# Altium PCB Node.PcbDoc
Units mil, origin at the board's own origin, x right, y up, seen from the top; angles counter-clockwise.
Board outline 1500 x 2000 mil, 4 copper layers (Top Layer, Ground, Power, Bottom Layer); 45 components, 41 nets, 164 pads, 55 vias.
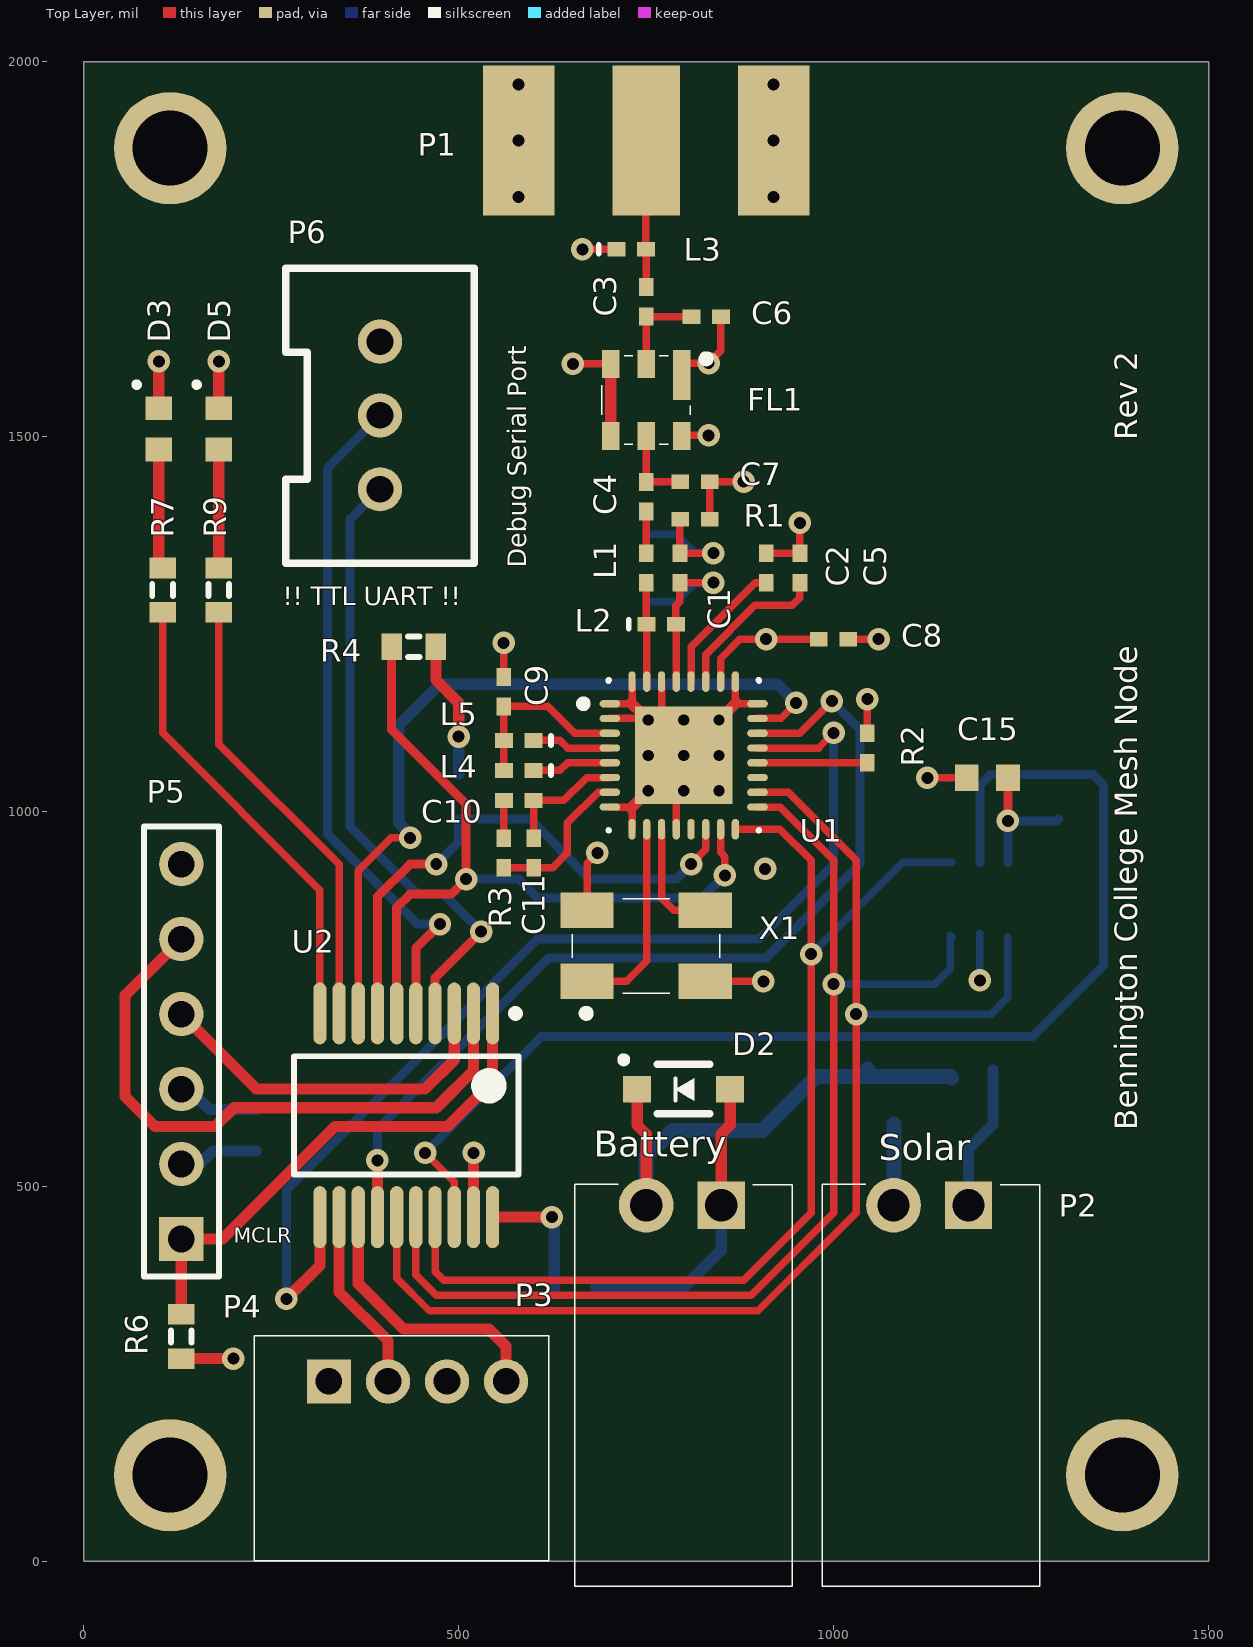
[diagram p0: Top Layer view]
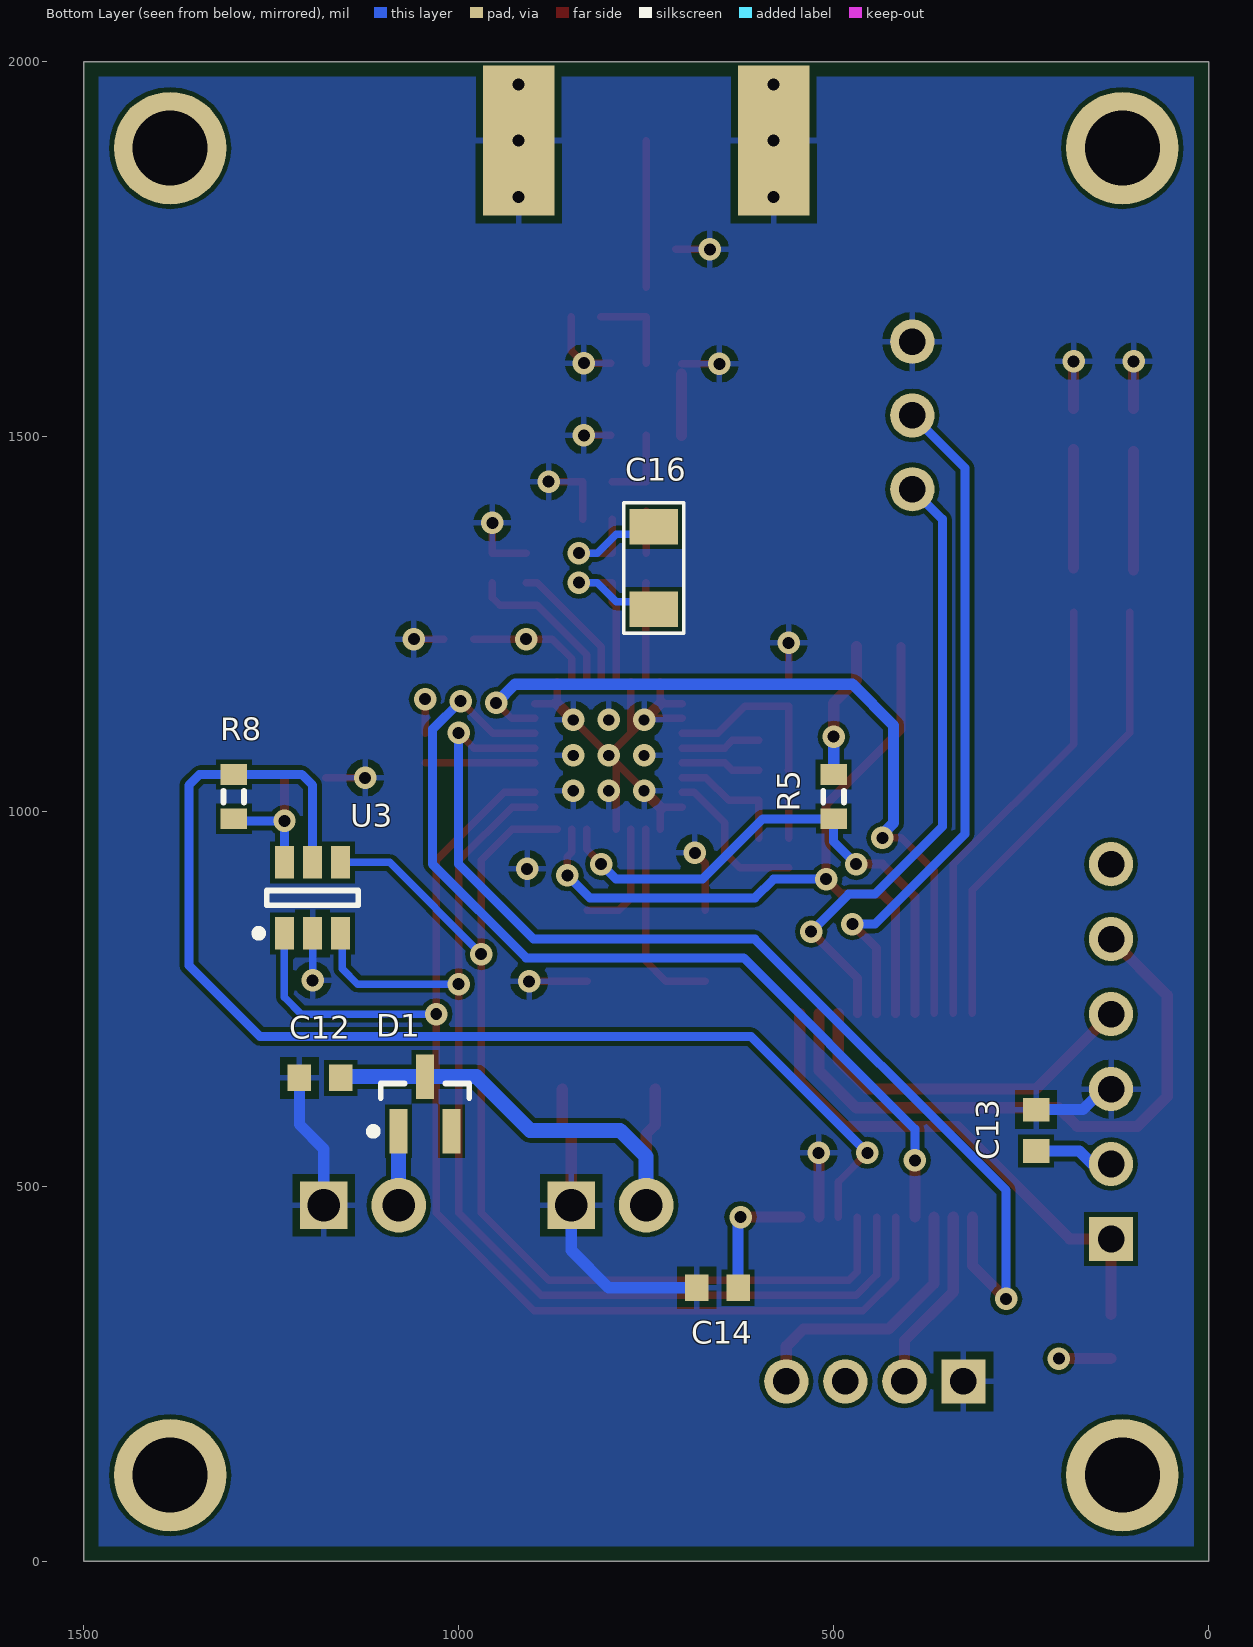
[diagram p1: Bottom Layer view, seen from below]
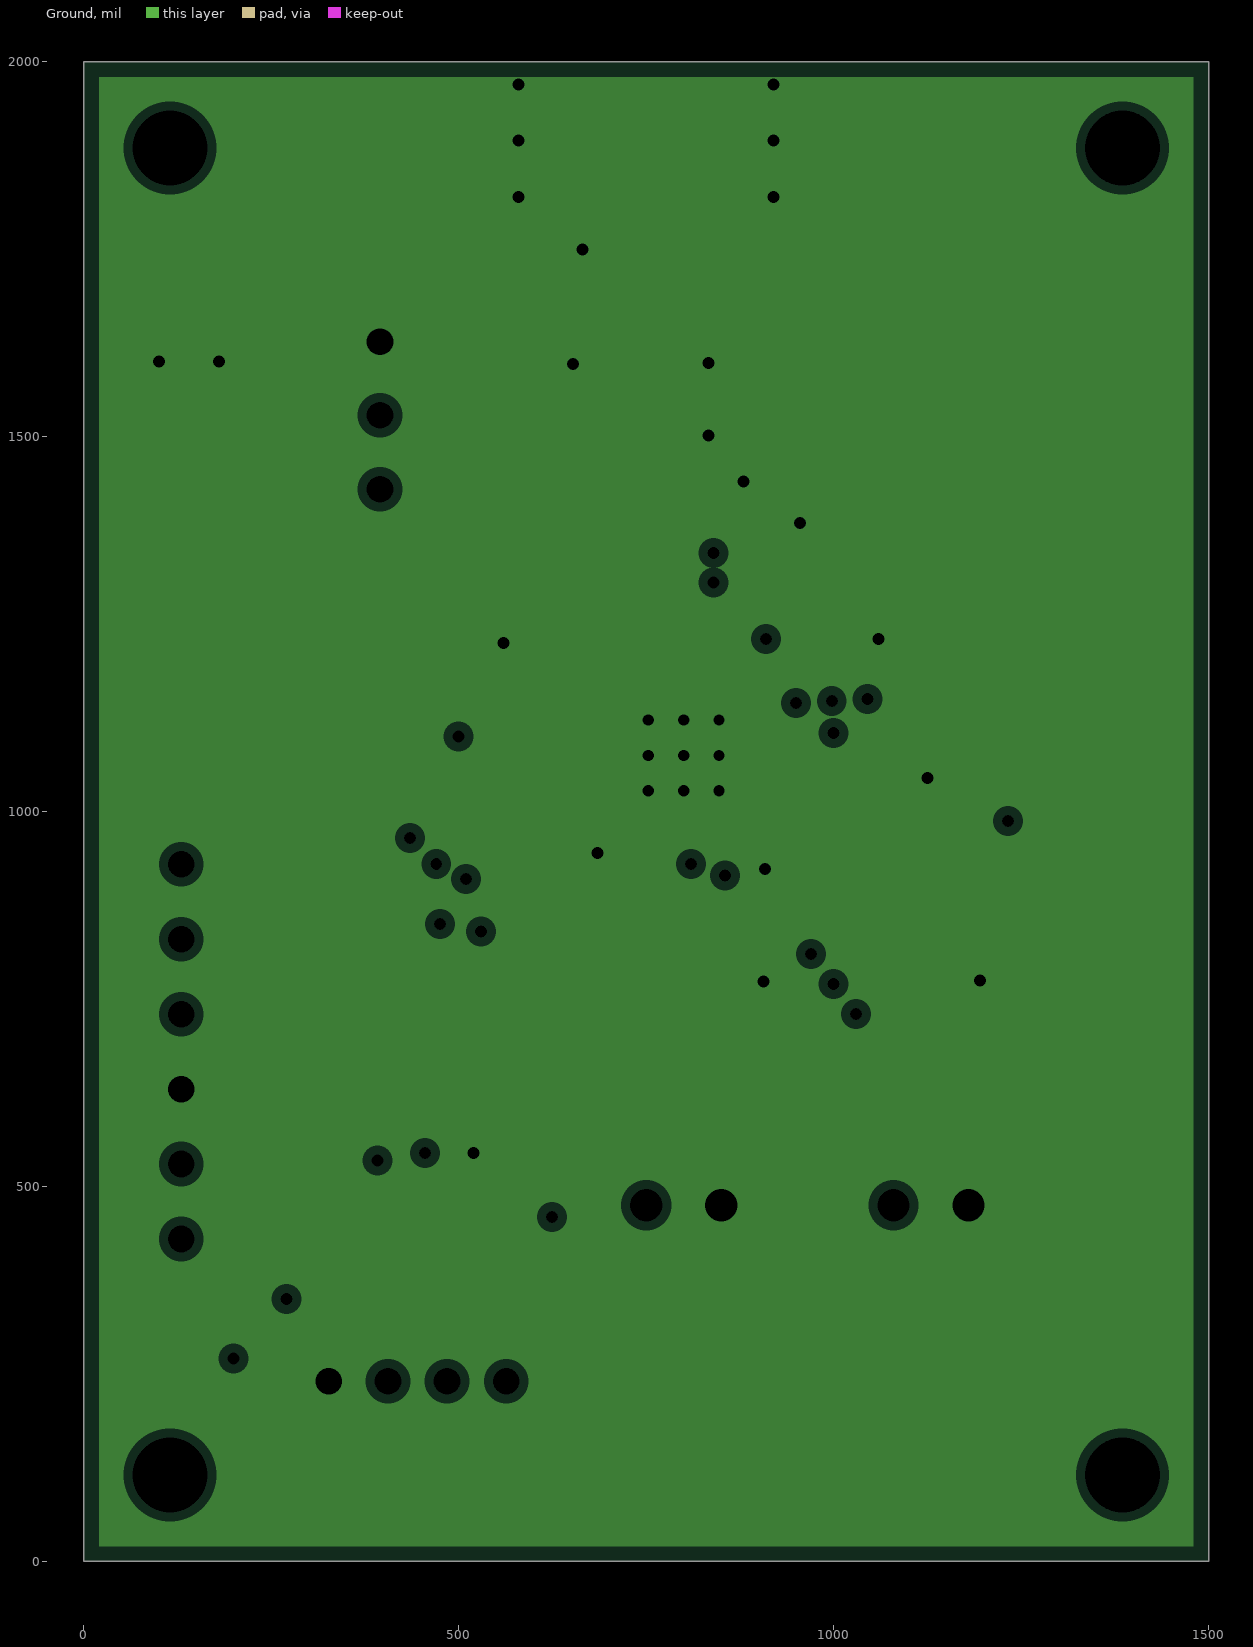
[diagram p2: Ground, clearances drawn from the general rule]
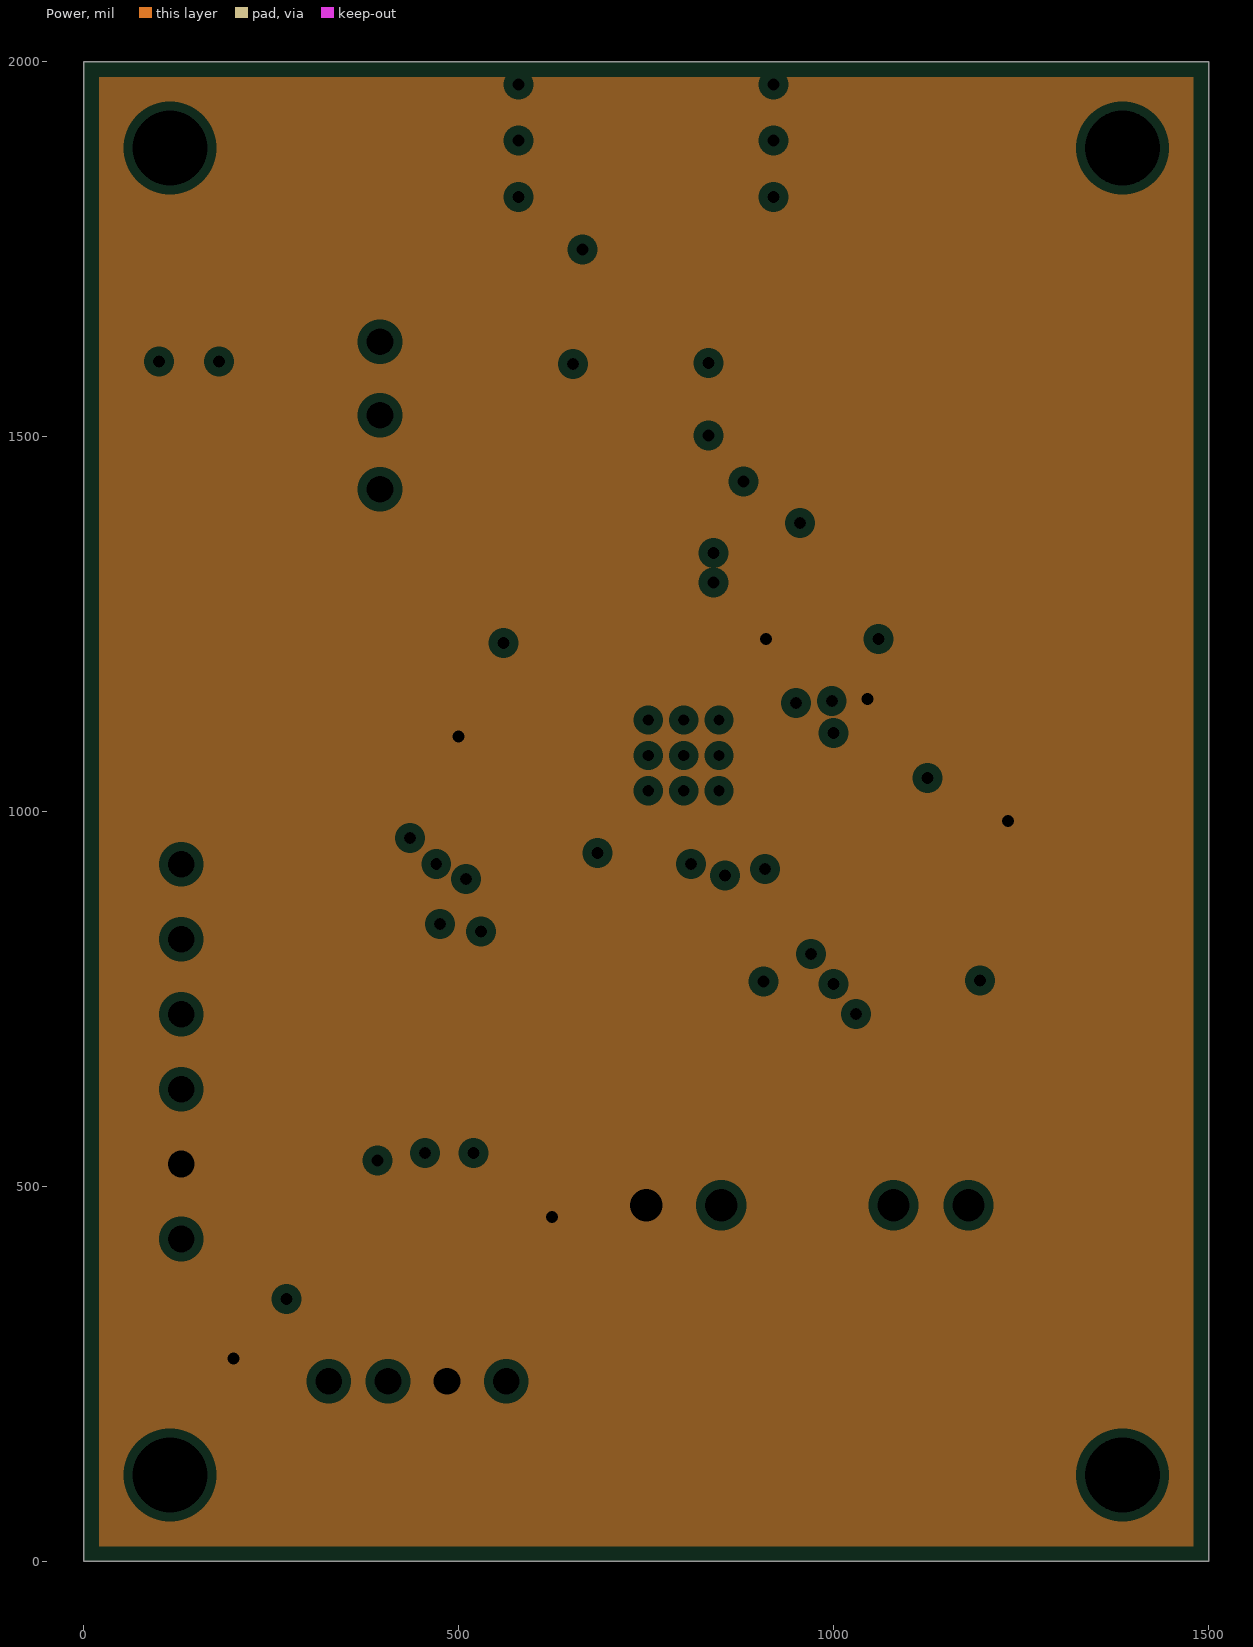
[diagram p3: Power, clearances drawn from the general rule]

## Layer stack, top to bottom
Top Solder: solder mask 0.4, Solder Resist, Dk 3.5
Top Layer: signal copper 1.4
Dielectric1: core 12.6, FR-4, Dk 4.8
Ground: plane copper 1.4, net GND
Dielectric2: prepreg 12.6, FR-4, Dk 4.8
Power: plane copper 1.4, net VIN
Dielectric3: core 12.6, FR-4, Dk 4.8
Bottom Layer: signal copper 1.4
Bottom Solder: solder mask 0.4, Solder Resist, Dk 3.5

## Board outline
0,0 1500,0 1500,2000 0,2000

## Design rules (kind name [scope] priority, off if disabled: settings)
Clearance "Clearance~Sunstone Circuits" [All] p1: gap=6 // Sunstone Circuits Minimum Clearance Rule (MLB~4&6 Layer Designs)
HoleSize "HoleSize~Sunstone Circuits" [All] p1: absolutevalues=TRUE maxlimit=251 minlimit=8 maxpercent=80.000 minpercent=20.000 // Sunstone Circuits Hole Size Rule (MLB~4&6 Layer Designs)
HoleSize Testpoint [All] p2: absolutevalues=TRUE maxlimit=100 minlimit=1 maxpercent=80.000 minpercent=20.000
HoleSize TestPointUsage [All] p3: absolutevalues=TRUE maxlimit=100 minlimit=1 maxpercent=80.000 minpercent=20.000
MinimumAnnularRing "MinimumAnnularRing~Sunstone Circuits" [All] p1: minimumring=7 // Sunstone Circuits Minimum Annular Ring (MLB~4&6 Layer Designs)
MinimumSolderMaskSliver [All] p1: minsoldermaskwidth=1
PlaneClearance "PlaneClearance~Sunstone Circuits" [All] p1: clearance=12 // Sunstone Circuits Power Plane Clearance Rule (MLB~4&6 Layer Designs)
PlaneConnect "PlaneConnect~Sunstone Circuits" [All] p1: planeconnectstyle=Relief reliefexpansion=10 reliefentries=4 reliefconductorwidth=8 reliefairgap=10 // Sunstone Circuits Power Plane Connect Rule (MLB~4&6 Layer Designs)
PolygonConnect "PolygonConnect~Sunstone Circuits" [All] p1: connectstyle=Relief reliefconductorwidth=8 reliefentries=4 polygonreliefangle="90 Angle" airgapwidth=10 // Sunstone Circuits Polygon Connect Style (MLB~4&6 Layer Designs)
RoutingVias "RoutingVias~Sunstone Circuits" [All] p1: holewidth=16 width=30 viastyle="Through Hole" minholewidth=8 minwidth=24 maxholewidth=20 maxwidth=40 // Sunstone Circuits Routing Vias Rule (MLB~4&6 Layer Designs)
ShortCircuit "ShortCircuit~Sunstone Circuits" [All] p1: allowed=FALSE // Sunstone Circuits Short Circuit Rule~Do Not Allow (MLB~4&6 Layer Designs)
SilkToSilkClearance [All] p1: silktosilkclearance=5
SilkToSolderMaskClearance [IsPad] p1: minsilkscreentomaskgap=3.5 clearancetoexposedcopper=TRUE
SolderMaskExpansion "SolderMaskExpansion~Sunstone Circuits" [All] p1: expansion=3 // Sunstone Circuits Solder Mask Expansion Rule (MLB~4&6 Layer Designs)
ViasUnderSMD "ViasUnderSMD~Sunstone Circuits" [All] p1: allowed=FALSE // Sunstone Circuits Vias Under SMD~Do Not Allow (MLB~4&6 Layer Designs)
Width "Width~Sunstone Circuits" [All] p1: maxlimit=100 minlimit=6 preferedwidth=10 // Sunstone Circuits Minimum Width Rule (MLB~4&6 Layer Designs)
22 further rules are at their usual default settings.

## Components (designator, comment, footprint, x,y, rotation, side; value= is the part's Value field where it differs from the comment)
C1 "0402" 0402 795,1325 r270 top
C2 "0402" 0402 910,1325 r90 top
C3 "0402" 0402 750,1680 r270 top
C4 "0402" 0402 750,1420 r270 top
C5 "0603" 0402 955,1325 r270 top
C6 "DNP" 0402 830,1660 r180 top
C7 "0402" 0402 815,1440 r180 top
C8 "0402" 0402 1000,1230 r0 top
C9 "0402" 0402 560,1160 r270 top
C10 "0402" 0402 580,1015 r180 top
C11 "0402" 0402 600,945 r270 top
C12 "0603" 1608[0603] 1185,645 r180 bottom
C13 "0603" 1608[0603] 230,575 r270 bottom
C14 "0603" 1608[0603] 655,365 r180 bottom
C15 "0603" 1608[0603] 1205,1045 r0 top
C16 "1206" "1206 CAP" 740,1325 r270 bottom
D1 "BAT54-7-F" SOT90P240X110-3N 1045,610 r90 bottom
D2 "BZT52C3V6-7-F" SOD-123 800,630 r0 top
D3 "0603" "0603 LED" 100,1510.47 r270 top
D5 "0603" "0603 LED" 180,1510.47 r270 top
FL1 "B3588" B3717 750,1535 r180 top
L1 "0402" 0402-A 750,1325 r270 top
L2 "0402" 0402-A 770,1250 r0 top
L3 "0402" 0402-A 730,1750 r0 top
L4 "0402" 0402-A 580,1055 r180 top
L5 "0402" 0402-A 580,1095 r180 top
P1 "142-0701-801" 142-0701-801 750,1895 r0 top
P2 "70553-0001" 070553-0001 1130,475 r180 top
P3 "70553-0001" 070553-0001 800,475 r180 top
P4 "53015-0410" 53015-0410 445,240 r0 top
P5 "Header 6" HDR1X6 130,430 r90 top
P6 "213415-3" 2132415-3 395,1430 r270 top
R1 "0402" 0402 815,1390 r180 top
R2 "0402" 0402 1045,1085 r90 top
R3 "0402" 0402 560,945 r90 top
R4 "0603" J1-0603 440,1220 r0 top
R5 "0603" J1-0603 500,1020 r90 bottom
R6 "0603" J1-0603 130,300 r90 top
R7 "Res3" J1-0603 105,1295.47 r270 top
R8 "0603" J1-0603 1300,1020 r270 bottom
R9 "Res3" J1-0603 180,1295.47 r270 top
U1 "MRF89XA" QFN50P500X500X75-32N 800,1075 r0 top
U2 "PIC24F32KA301" SOP127P600-8N 430,595 r270 top
U3 "25AA02E48T-I/OT" SOT-23-OT6_N 1195,885 r90 bottom
X1 "12.8 MHz" ABM3B 750,825 r0 top

## Footprints (in the part's own frame and the unit in brackets; to place one, negate y for a bottom-side part, rotate by r counter-clockwise, add the part's x,y. Pads: shape width x height; smd on the part's side, far side on the other; paste and mask are expansions set on the pad)
142-0701-801 [mil] "SMA Jack, 50 ohm, End Launch"
  rect 90x200 smd paste-200: 1(0,0)
  rect 95x200 smd paste-200: 2(-170,0) 3(170,0)
  rect 95x200 smd far side paste-200: 4(170,0) 5(-170,0)
  body extent -185,-87 191,600, height 202
0402 [mm] "Chip Capacitor, Body 1.0x0.5mm, IPC High Density"
  rect 0.6x0.5 smd: 1(-0.5,0) 2(0.5,0)
  body extent -0.55,-0.3 0.55,0.3, height 1.3
0402-A [mm] "Chip Inductor, Body 1.0x0.5mm, IPC High Density"
  rect 0.6x0.5 smd: 1(-0.5,0) 2(0.5,0)
  body extent -0.55,-0.3 0.55,0.3, height 0.55
"0603 LED" [mm] "LED, Body 1.6x0.8mm, IPC High Density"
  rect 0.8x0.9 smd: 1(-0.7,0) 2(0.7,0)
  silkscreen extent -1.55,-0.8 -1.45,-0.7, body extent -0.87,-0.48 0.87,0.48, height 1.3
"1206 CAP" [mm] "Chip Capacitor, 2-Leads, Body 3.10x1.50mm, IPC Medium Density"
  rect 1.2x1.65 smd: 1(-1.4,0) 2(1.4,0)
  silkscreen extent -2.21,-1.02 2.21,1.02, body extent -1.6,-0.8 1.6,0.8, height 0.79
1608[0603] [mm] "Chip Capacitor, Body 1.6x0.8mm, IPC High Density"
  rect 0.8x0.9 smd: 1(-0.7,0) 2(0.7,0)
  body extent -0.87,-0.48 0.87,0.48, height 1.3
53015-0410 [mm] "2mm RA Header"
  rect 1.5x1.5 hole 0.9: 1(-3,0)
  round 1.5 hole 0.9: 2(-1,0) 3(1,0) 4(3,0)
  silkscreen extent -5.54,-6.07 4.47,1.55, body extent -5.53,-6.06 4.47,1.54, height 4.72
070553-0001 [mil] "Shrouded 2 Pin Header, RA, 0.100"
  rect 63x63 hole 43: 1(-50,0)
  round 73 hole 43: 2(50,0)
  silkscreen extent -145,-28 145,508, body extent -144,-27 146,508, height 273
2132415-3 [mm] "3 Position Vertical Header, 2.5mm"
  round 1.5 hole 0.9: 1(0,0) 2(-2.5,0) 3(-5,0)
  silkscreen extent -7.49,-3.2 2.51,3.2, body extent -7.5,-3.2 2.5,3.2, height 8.8
ABM3B [mm] "5.0 x 3.2 mm SMT"
  rect 1.8x1.2 smd: 1(-2,-1.302) 2(2,-1.302) 3(2,1.098) 4(-2,1.098)
  silkscreen extent -2.5,-2.51 2.5,1.5, body extent -2.5,-1.7 2.5,1.5, height 1.1
B3717 [mm] "3.0 x 3.0 x 1.1 mm SMT"
  rect 0.6x1.7 smd: 1(-1.2,-1.206)
  rect 0.6x0.95 smd: 2(0,-1.581) 3(1.2,-1.581) 4(1.2,0.869) 5(0,0.869) 6(-1.2,0.869)
  silkscreen extent -2.16,-1.88 1.5,1.14, body extent -1.5,-1.86 1.5,1.14, height 1.1
HDR1X6 [mm] "Connector; Header; 6 Position"
  rect 1.5x1.5 hole 0.9: 1(0,0)
  round 1.5 hole 0.9: 2(2.54,0) 3(5.08,0) 4(7.62,0) 5(10.16,0) 6(12.7,0)
  silkscreen extent -1.27,-1.27 13.97,1.27
J1-0603 [mm] "Chip Resistor, Body 1.6x0.8mm, IPC High Density"
  rect 0.7x0.9 smd: 1(-0.75,0) 2(0.75,0)
  silkscreen extent -0.2,-0.35 0.2,0.35, body extent -0.85,-0.48 0.85,0.48, height 0.9
QFN50P500X500X75-32N [mm] "QFN, 32-Leads, Body 5.1x5.1mm (max), Pitch 0.50mm, IPC Medium Density"
  oval 0.7x0.25 smd: 1(-2.5,1.75) 2(-2.5,1.25) 3(-2.5,0.75) 4(-2.5,0.25) 5(-2.5,-0.25) 6(-2.5,-0.75) 7(-2.5,-1.25) 8(-2.5,-1.75) 17(2.5,-1.75) 18(2.5,-1.25) 19(2.5,-0.75) 20(2.5,-0.25) 21(2.5,0.25) 22(2.5,0.75) 23(2.5,1.25) 24(2.5,1.75)
  oval 0.25x0.7 smd: 9(-1.75,-2.5) 10(-1.25,-2.5) 11(-0.75,-2.5) 12(-0.25,-2.5) 13(0.25,-2.5) 14(0.75,-2.5) 15(1.25,-2.5) 16(1.75,-2.5) 25(1.75,2.5) 26(1.25,2.5) 27(0.75,2.5) 28(0.25,2.5) 29(-0.25,2.5) 30(-0.75,2.5) 31(-1.25,2.5) 32(-1.75,2.5)
  rect 3.3x3.3 smd paste-0.254: 33(0,0)
  silkscreen extent -3.52,-2.55 2.55,2.55, body extent -2.55,-2.55 2.55,2.55, height 0.75
SOD-123 [mm] "Generic Diode"
  rect 0.95x0.9 smd: 1(1.575,0) 2(-1.575,0)
  silkscreen extent -2.12,-0.84 0.89,1.08, body extent -1.87,-0.84 1.98,0.86, height 0.92
SOP127P600-8N [mm]
  oval 2.1x0.45 smd: 1(-3.45,2.925) 2(-3.45,2.275) 3(-3.45,1.625) 4(-3.45,0.975) 5(-3.45,0.325) 6(-3.45,-0.325) 7(-3.45,-0.975) 8(-3.45,-1.625) 9(-3.45,-2.275) 10(-3.45,-2.925) 11(3.45,-2.925) 12(3.45,-2.275) 13(3.45,-1.625) 14(3.45,-0.975) 15(3.45,-0.325) 16(3.45,0.325) 17(3.45,0.975) 18(3.45,1.625) 19(3.45,2.275) 20(3.45,2.925)
  silkscreen extent -3.57,-3.8 2,3.83, body extent -2.8,-3.77 2.8,3.78, height 2
SOT90P240X110-3N [mm] "SOT23, 3-Leads, Body 2.90x2.40mm, Pitch 0.90mm, IPC Medium Density"
  rect 1.5x0.6 smd: 1(-0.925,0.9) 2(-0.925,-0.9) 3(0.925,0)
  silkscreen extent -1.05,-1.5 0.7,1.88, body extent -0.7,-1.5 0.7,1.5, height 1.1
SOT-23-OT6_N [mm] "SOT23, 6-Leads, Body 2.9x1.6mm, Pitch 0.95mm, Lead Span 2.7mm, IPC Medium Density"
  rect 1.1x0.65 smd: 1(-1.2,0.95) 2(-1.2,0) 3(-1.2,-0.95) 4(1.2,-0.95) 5(1.2,0) 6(1.2,0.95)
  silkscreen extent -1.32,-1.55 0.25,1.95, body extent -0.9,-1.55 0.9,1.55, height 1.45

## Part data
C1 C2 C3 C4 C5 C6 C7 C8 C9 C10 C11 C12 C13 C14 C15: library part "Cap Semi", "Capacitor (Semiconductor SIM Model)"
C16: library part "1206 Capacitor", "Surface Mount Ceramic Capacitor"
D1: "Schottky Barrier Diode, 200mA"
D2: "Zener Diode, 3.6V, 500 mW"
D3: library part "Blue LED", "Blue LED"
D5: library part "Red LED", "Red LED"
FL1: "915 MHz Saw Filter"
L1 L2 L3 L4 L5: library part Inductor, "Inductor"
P1: "SMA 50 ohm Female Socket, End Launch"
P2 P3: "Header, Shrouded, 2 Pin, RA"
P4: "4 Position, 2.00 mm Header, RA"
P5: "Header, 6-Pin"
P6: "3 Position Vertical Header, 2.5 mm"
R1 R2 R3 R4 R5 R6 R8: library part Res3, "Resistor"
R7 R9: "Resistor"
U1: "ISM Sub-GHz Transceiver"
U2: "PIC Microcontroller, 32K Flash, 20 pin"
U3: "2K SPI Bus Serial EEPROM with EUI-48 Node Identity, 6-Pin SOT-23, Industrial Temperature, Tape and Reel"
X1: library part ABM3B-155-12.800MHz-T, "Abracon 12.8 MHz, 10ppm"

## Free pads (board coordinates)
  round 150 hole 100: ""(115,115) ""(115,1885) ""(1385,115) ""(1385,1885)

## Via types
v1: diameter 30, hole 16, Top Layer to Bottom Layer, 46 vias
v2: diameter 30, hole 15, Top Layer to Bottom Layer, tented top, 9 vias

## Nets (pads, with @x,y where several pads share a name; then routed paths per layer and width w, separated by ;. In a path a pad name is that pad's centre, name@x,y a point inside that pad or via, vN(x,y) a via of type N, cw(c..) or ccw(c..) an arc to the next point about the centre after c; other vN are vias at no path point)
CSCON: R5.1 U1.14 U2.7 | length 731.3
  Top Layer w10: v1(810,930) 829.53,949.53 U1.14
  Top Layer w12: U2.7 391.61,886.61 435,930 v1(470,930)
  Bottom Layer w12: v1(470,930) 500,960 R5.1 594.53,990.47 675,910 790,910 v1(810,930)
CSDATA: R4.1 U1.15 U2.6 | length 1032.8
  Top Layer w10: U1.15 849.21,945.79 855,940 v1(855,915)
  Top Layer w12: R4.1 410.47,1109.53 510,1010 v1(510,910) 490,890 435,890 417.2,872.2 U2.6
  Bottom Layer w12: v1(510,910) 580,910 605,885 825,885 v1(855,915)
CSEE: R8.1 U2.18 U3.5 | length 1630.3
  Top Layer w10: v1(455,545) 493.98,506.02 U2.18
  Bottom Layer w12: v1(455,545) 610,700 1265,700 1360,795 1360,1035 1345.47,1049.53 R8.1 1209.53,1049.53 1195,1035 U3.5
GND: C2.2 C5.1 C6.1 C7.1 C8.2 C9.1 C12.1 C13.1 C14.1 C15.1 D2.1 D3.1 D5.1 FL1.1 FL1.3 FL1.4 FL1.6 L3.1 P1.2 P1.3 P1.4 P1.5 P2.1 P3.1 P4.1 P5.3 P6.3 R1.1 U1.1 U1.2 U1.8 U1.9 U1.12 U1.24 U1.25 U1.30 U1.32 U1.33 U2.19 U3.2 X1.2 X1.4 | length 2437.8
  Top Layer w10: C9.1 v1(560,1225) ; v1(652.23,1597.23) FL1.3 ; v1(665,1750) L3.1 ; X1.4 671.26,931.26 v1(685,945) ; U1.8 728.9,1006.1 730,1005 731.1,1003.9 U1.9 ; U1.2 U1.33@739.21,1124.21 ; U1.1 728.9,1143.9 730,1145 731.1,1146.1 U1.32 ; v2(752.76,1027.76) U1.33@790.16,1065.16 ; v2(752.76,1122.24) U1.33@770.47,1104.53 ; U1.30 U1.33@770.47,1104.53 ; U1.12 U1.33@790.16,1065.16 ; FL1.6@797.24,1501.77 v1(833.23,1501.77) ; FL1.1@797.24,1598.23 v1(833.23,1598.23) 849.68,1614.69 C6.1 ; X1.2 v1(906.24,773.76) ; R1.1 C7.1 v1(880,1440) ; v2(847.24,1122.24) v2(800,1075) ; U1.25 868.9,1146.1 870,1145 871.1,1143.9 U1.24 ; C2.2 C5.1 v1(955,1385) ; C8.2 v1(1060,1230) ; v1(1125,1045) C15.1 ; U1.33@770.47,1104.53 v2(800,1075) ; U1.33@790.16,1065.16 v2(800,1075)
  Top Layer w15: D3.1 v1(100,1600.47) ; D5.1 v1(180,1600.47) ; U2.19 519.57,544.57 v1(520,545) ; FL1.4@702.76,1501.77 FL1.3@702.76,1583.46 ; 730,1005 v2(752.76,1027.76) ; 730,1145 U1.33@745,1130 ; v2(847.24,1122.24) 870,1145 ; P3.1 850,570 862.01,582.01 D2.1
  Bottom Layer w10: v1(1195,775) U3.2
  Bottom Layer w15: P5.3 140,630 167.44,602.56 C13.1 ; C14.1 800,365 850,415 P3.1 ; P2.1 1180,550 1212.56,582.56 C12.1@1212.56,655
  other v1: 908.74,923.74 580,1820 920,1820 580,1895 920,1895 580,1970 920,1970
  other v2: 800,1027.76 847.24,1027.76 752.76,1075 847.24,1075 800,1122.24
INT0: U1.21 U2.11 | length 1467.9
  Top Layer w10: U1.21 979.84,1084.84 v1(1000,1105)
  Top Layer w15: v1(270,350) 314.84,394.84 U2.11
  Bottom Layer w12: v1(270,350) 270,495 605,830 900,830 1000,930 v1(1000,1105)
INT2: U1.22 U2.14 | length 1257.1
  Top Layer w10: U1.22 954.53,1104.53 v1(997.5,1147.5)
  Top Layer w15: U2.14 v1(391.61,535)
  Bottom Layer w12: v1(391.61,535) 391.61,576.61 620,805 910,805 1035,930 1035,1110 v1(997.5,1147.5)
NetC1_1: C1.1 C16.1 R1.2 | length 185.3
  Top Layer w10: R1.2 795,1389.69 C1.1 v1(839.68,1344.69)
  Bottom Layer w10: C16.1@755,1370.12 789.88,1370.12 815.32,1344.69 v1(839.68,1344.69)
NetC1_2: C1.2 C16.2 L2.2 U1.29 | length 274.2
  Top Layer w10: U1.29 790.16,1249.53 L2.2 789.69,1274.69 795,1280 C1.2 v1(839.69,1305.31)
  Bottom Layer w10: C16.2@755,1279.88 789.88,1279.88 815.32,1305.31 v1(839.69,1305.31)
NetC2_1: C2.1 U1.28 | length 182
  Top Layer w10: U1.28 809.84,1219.84 895.32,1305.31 C2.1
NetC3_1: C3.1 L3.2 P1.1 | length 195.6
  Top Layer w10: C3.1 750,1749.69 L3.2 749.69,1894.69 P1.1
NetC3_2: C3.2 C6.2 FL1.2 | length 122.5
  Top Layer w10: FL1.2@750,1598.23 C3.2 810,1660.31 C6.2
NetC4_1: C4.1 C7.2 FL1.5 | length 107.5
  Top Layer w10: FL1.5@750,1501.77 C4.1 795,1439.69 C7.2
NetC4_2: C4.2 L1.1 | length 55.6
  Top Layer w10: L1.1 C4.2
NetC5_2: C5.2 U1.27 | length 213.2
  Top Layer w10: U1.27 829.53,1209.53 895,1275 945,1275 955,1285 C5.2
NetC9_2: C9.2 L4.2 L5.2 U1.3 | length 241.8
  Top Layer w10: L4.2 560,1055.31 C9.2 618.74,1140.31 654.53,1104.53 U1.3
NetC10_1: C10.1 C11.1 U1.6 | length 165
  Top Layer w10: C11.1 600,1014.68 C10.1 640,1015 670.47,1045.47 U1.6
NetC10_2: C10.2 R3.2 | length 50.4
  Top Layer w10: R3.2 560,1014.68 C10.2
NetC11_2: C11.2 R3.1 U1.7 | length 206.6
  Top Layer w10: R3.1 C11.2 625.31,925.31 645,945 645,985 685.79,1025.79 U1.7
NetD1_1: D1.1 P2.2 | length 108.8
  Bottom Layer w20: P2.2 1080.43,475.43 D1.1@1080.43,583.58
NetD3_2: D3.2 R7.1 | length 157.9
  Top Layer w15: R7.1@100,1322.56 D3.2@100,1480.47
NetD5_2: D5.2 R9.1 | length 157.9
  Top Layer w15: R9.1 D5.2
NetL1_2: L1.2 L2.1 U1.31 | length 132.2
  Top Layer w10: L1.2 750.32,1305 L2.1 750.79,1249.53 U1.31
NetL4_1: L4.1 U1.5 | length 106.1
  Top Layer w10: L4.1 635,1055 645.16,1065.16 U1.5
NetL5_1: L5.1 U1.4 | length 106.1
  Top Layer w10: L5.1 635,1095 645.16,1084.84 U1.4
NetR2_1: R2.1 U1.20 | length 146.6
  Top Layer w10: U1.20 1044.84,1065.16 R2.1
NetR7_2: R7.2 U2.10 | length 622
  Top Layer w10: R7.2 105,1105 314.84,895.16 U2.10
NetR9_2: R9.2 U2.9 | length 601.6
  Top Layer w10: R9.2 180,1090 340.43,929.57 U2.9
NetU1_10: U1.10 X1.1 | length 266.5
  Top Layer w10: X1.1 723.76,773.76 750.79,800.79 U1.10
NetU1_11: U1.11 X1.3 | length 157.1
  Top Layer w10: U1.11 770.47,884.53 786.76,868.24 X1.3
PGC: P5.5 U2.2 | length 829.3
  Top Layer w15: P5.5 55,755 55,620 95,580 175,580 200,605 470,605 519.57,654.57 U2.2
PGD: P5.4 U2.3 | length 483.4
  Top Layer w15: P5.4 230,630 455,630 493.98,668.98 U2.3
PLOCK: U1.23 U2.8 | length 1056.9
  Top Layer w10: U2.8 366.02,921.02 410,965 v1(435,965) ; U1.23 929.21,1124.21 v1(950,1145)
  Bottom Layer w15: v1(435,965) 435,970 420,985 420,1115 475,1170 925,1170 v1(950,1145)
RX: P6.2 U2.5 | length 919.6
  Top Layer w12: U2.5 442.8,817.8 v1(475,850)
  Bottom Layer w12: P6.2 325,1458.43 325,970 445,850 v1(475,850)
SCK: U1.18 U2.15 U3.1 | length 1697.8
  Top Layer w10: U2.15 417.2,377.8 461,334 899,334 1030,465 v1(1030,730) 1030,935 939.21,1025.79 U1.18
  Bottom Layer w10: v1(1030,730) 1210,730 1232.4,752.4 U3.1@1232.4,832.76
SCL: P4.2 U2.12 | length 246.2
  Top Layer w15: U2.12 340.43,359.57 405.63,294.37 P4.2
SDA: P4.4 U2.13 | length 367.3
  Top Layer w15: U2.13 366.02,370.41 426.43,310 540,310 563.11,286.89 P4.4
SDI: U1.16 U2.17 U3.4 | length 1442.8
  Top Layer w10: U2.17 468.39,386.61 480,375 880,375 970,465 v1(970,810) 970,935 928.43,976.57 U1.16
  Bottom Layer w10: v1(970,810) 1092.24,932.24 U3.4
SDO: U1.17 U2.16 U3.3 | length 1503.6
  Top Layer w10: U2.16 442.8,382.2 470,355 890,355 1000,465 v1(1000,770) 1000,935 928.9,1006.1 U1.17
  Bottom Layer w10: v1(1000,770) 1135,770 1155.35,790.35 1155.35,835 U3.3@1157.6,832.76
TX: P6.1 U2.4 | length 834.3
  Top Layer w12: U2.4 468.39,778.39 v1(530,840)
  Bottom Layer w12: P6.1 355,1390 355,980 445,890 480,890 v1(530,840)
VIN: C8.1 C12.2 C13.2 C14.2 C15.2 D1.3 D2.2 P3.2 P4.3 P5.2 R2.2 R4.2 R5.2 R6.1 R8.2 U1.26 U2.20 U3.6 | length 1614.2
  Top Layer w10: U1.26 849.21,1204.21 875,1230 C8.1 ; R2.2 v1(1045,1150)
  Top Layer w12: v1(1232.4,987.6) C15.2@1232.4,1045.04
  Top Layer w15: R6.1 v1(199.53,270.47) v1@200,270 ; R4.2 469.53,1175.47 500,1145 v1(500,1100) ; U2.20 v1(624.17,459.17) ; D2.2 737.99,582.01 750,570 P3.2
  Bottom Layer w12: U3.6 v1(1232.4,987.6) 1297.13,987.6 R8.2
  Bottom Layer w15: P5.2 155,530 172.44,547.44 C13.2 ; R5.2 v1(500,1100) ; v1(624.17,459.17) 627.44,455.91 C14.2
  Bottom Layer w20: P3.2@750.43,475.43 P3.2 750,540 785,575 905,575 976.42,646.42 D1.3 1156.02,646.42 C12.2 ; D1.3@1045,656.42 D1.3@1046.42,655
  other v1: 910,1230
VPP: P5.1 R6.2 U2.1 | length 693.3
  Top Layer w15: R6.2 P5.1 185,430 335,580 485,580 545.16,640.16 U2.1
pads on no net: D1.2 P5.6 U1.13 U1.19

## Polygon pours and split planes (outlines as drawn)
GND on Bottom Layer "BotttomFlood" (solid, pour order 2): 20,20 1480,20 1480,1980 20,1980
GND on Ground (split plane): 1479.9,20.1 20.1,20.1 20.1,1979.9 1479.9,1979.9
VIN on Power (split plane): 1479.9,20.1 20.1,20.1 20.1,1979.9 1479.9,1979.9

## Silkscreen, mask and mechanical layers (free items; w line width, h text height)
Top Overlay:
  text "Rev 2" at 1405,1495 h30 r90
  text "Debug Serial Port" at 590,1325 h25 r90
  text "!! TTL UART !!" at 265,1275 h25
  text "Bennington College Mesh Node" at 1405,575 h30 r90
  text "Battery" at 680,540 h35
  text "Solar" at 1060,535 h35
  text "MCLR" at 200,425 h20
Mechanical 1:
  the board outline again, w2
Mechanical 3:
  lines w2: 20,20 20,1980 1480,1980 1480,20 20,20